# Altium PCB MyPCB.PcbDoc
Units mil, origin at the board's own origin, x right, y up, seen from the top; angles counter-clockwise.
Board outline 13489.26 x 4301.77 mil, 2 copper layers (Top Layer, Bottom Layer); 90 components, 113 nets, 667 pads, 53 vias.
Unrouted connection lines stored in the file: 2.
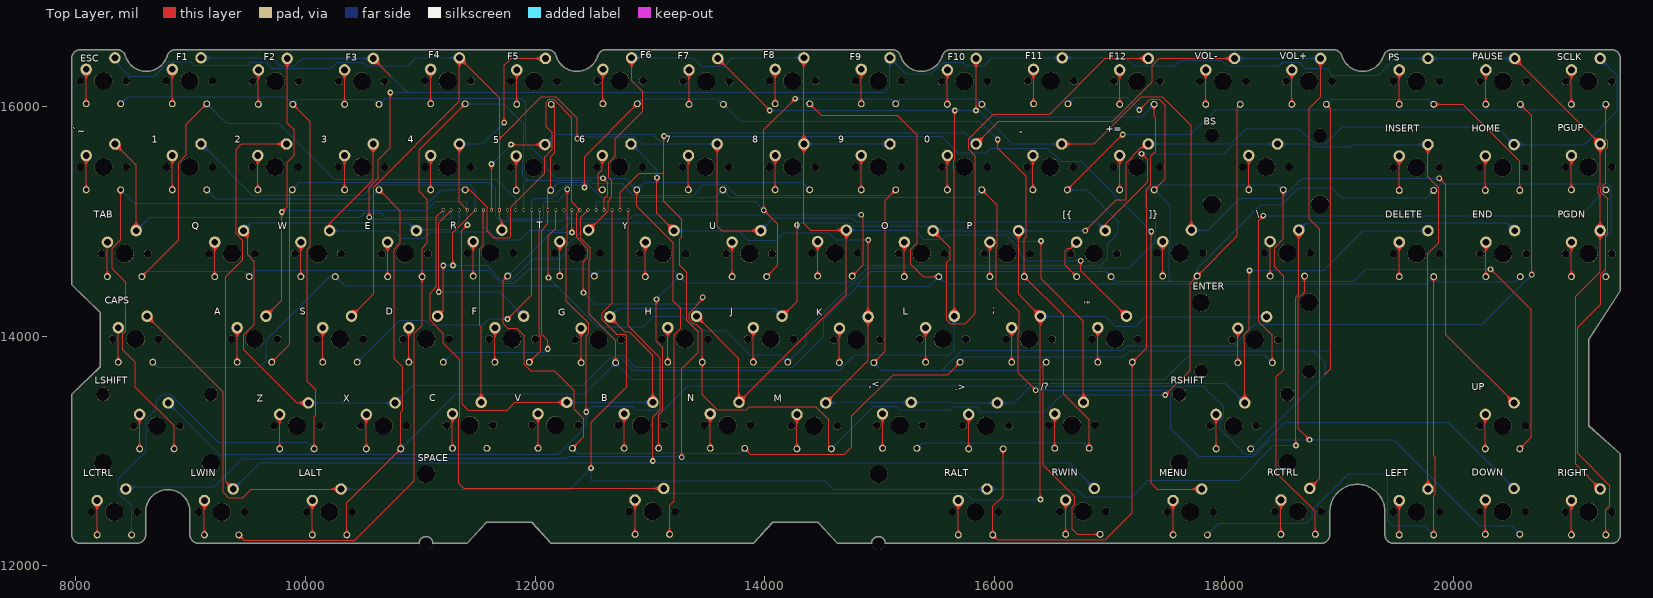
[diagram p0: Top Layer view]
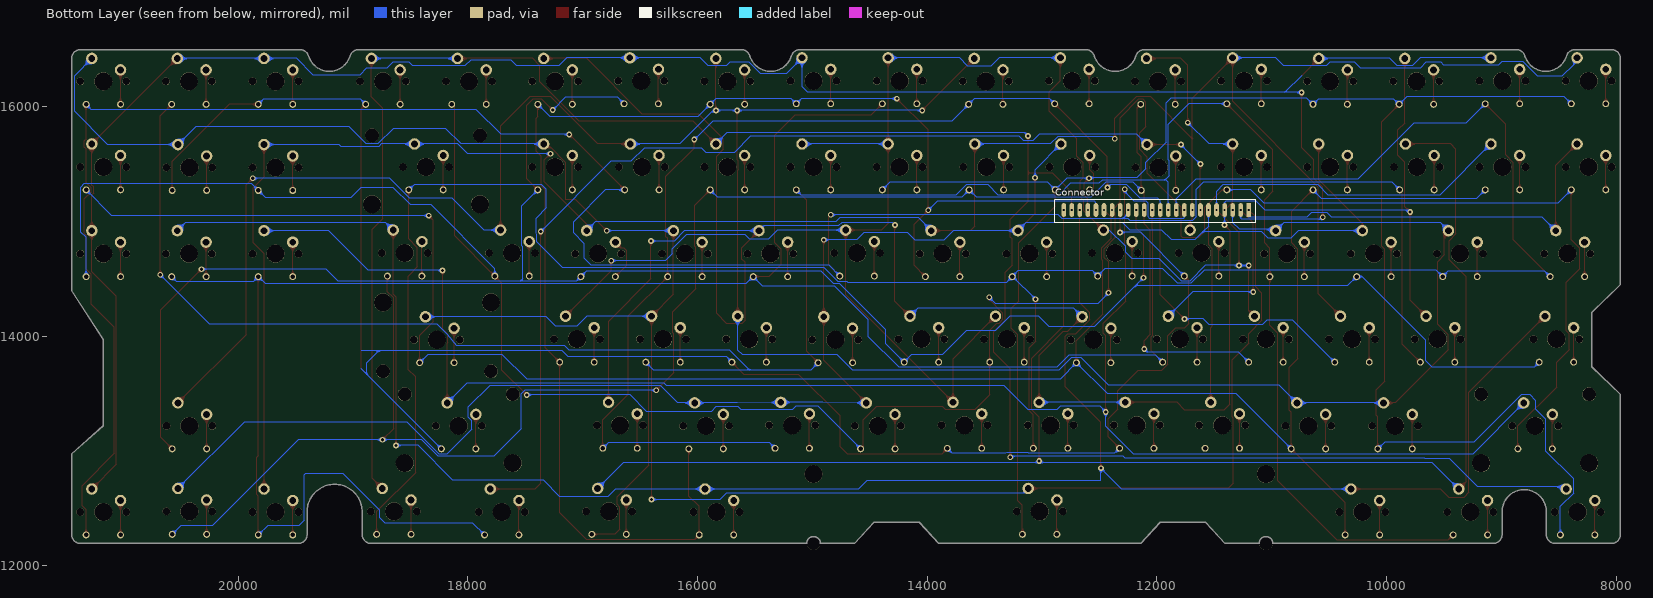
[diagram p1: Bottom Layer view, seen from below]

## Layer stack, top to bottom
Top Solder: solder mask 0.4, Solder Resist, Dk 3.5
Top Layer: signal copper 1.4
Dielectric 1: dielectric 12.6, FR-4, Dk 4.8
Bottom Layer: signal copper 1.4
Bottom Solder: solder mask 0.4, Solder Resist, Dk 3.5

## Board outline
8041.31,12195.79 8528.79,12195.79 ccw(c8528.79,12274.79) 8607.8,12274.79 8607.8,12471.66 cw(c8800.7,12471.66) 8993.61,12471.66 8993.61,12274.79 cw(c8993.87,12274.79) 8993.61,12274.8 8993.61,12274.79 ccw(c9072.61,12274.79) 9072.61,12195.79 10989.45,12195.79 ccw(c10989.45,12196.05) 10989.71,12196.05 ccw(c10989.45,12196.05) 10989.71,12196.06 cw(c11049.45,12196.64) 11109.18,12196.64 cw(c11049.45,12196.64) 11109.18,12196.06 ccw(c11109.44,12196.05) 11109.18,12196.05 ccw(c11109.44,12196.05) 11109.44,12195.79 11405.79,12195.79 ccw(c11405.79,12196.05) 11405.98,12195.87 11405.98,12195.88 11575.68,12380.85 11969.23,12380.85 12139.09,12195.88 ccw(c12139.28,12196.05) 12139.09,12195.87 12139.09,12195.88 12139.09,12195.87 ccw(c12139.28,12196.05) 12139.28,12195.79 12743.81,12195.79 ccw(c12743.86,12196.05) 12743.86,12195.78 13295.04,12195.78 ccw(c13295.04,12196.05) 13295.08,12195.79 13899.61,12195.79 ccw(c13899.61,12196.05) 13899.81,12195.87 13899.81,12195.88 14069.75,12380.94 14463.3,12380.75 14632.91,12195.88 14632.91,12195.87 cw(c14633.11,12196.05) 14632.91,12195.88 14632.91,12195.87 ccw(c14633.11,12196.05) 14633.11,12195.79 14929.45,12195.79 ccw(c14929.45,12196.05) 14929.71,12196.05 ccw(c14929.45,12196.05) 14929.71,12196.06 cw(c14989.45,12196.64) 15049.18,12196.64 cw(c14989.45,12196.64) 15049.18,12196.06 ccw(c15049.44,12196.05) 15049.18,12196.05 ccw(c15049.44,12196.05) 15049.44,12195.79 18841.3,12195.79 ccw(c18841.3,12274.79) 18920.3,12274.79 ccw(c18920.04,12274.79) 18920.3,12274.8 18920.3,12471.66 cw(c19160.08,12471.66) 18949.15,12585.68 ccw(c18948.92,12585.81) 18949.15,12585.69 cw(c19160.08,12471.66) 18951.72,12590.32 cw(c19160.08,12471.66) 18951.73,12590.33 cw(c19160.08,12471.66) 19368.35,12590.47 cw(c19160.08,12471.66) 19368.35,12590.46 cw(c19368.58,12590.59) 19368.35,12590.47 19368.35,12590.46 cw(c19160.08,12471.66) 19371,12585.69 cw(c19160.08,12471.66) 19371.01,12585.68 cw(c19371.24,12585.81) 19371,12585.69 19371.01,12585.68 cw(c19160.08,12471.66) 19399.85,12471.66 19399.85,12274.79 cw(c19400.12,12274.79) 19399.85,12274.8 19399.85,12274.79 ccw(c19478.86,12274.79) 19478.86,12195.79 21372.56,12195.79 ccw(c21372.56,12274.79) 21451.56,12274.79 21451.56,12974.32 ccw(c21451.3,12974.32) 21451.47,12974.52 21451.48,12974.52 21451.47,12974.52 cw(c21451.3,12974.32) 21451.48,12974.52 21451.47,12974.52 21175.97,13221.78 21175.97,13971.59 21451.52,14397.25 ccw(c21451.3,14397.4) 21451.56,14397.4 21451.56,16418.55 ccw(c21372.56,16418.55) 21372.56,16497.55 19463.47,16497.55 ccw(c19463.47,16418.55) 19387.94,16441.73 ccw(c19388.19,16441.65) 19387.94,16441.72 ccw(c19206.95,16497.29) 19387.94,16441.73 19387.94,16441.72 cw(c19206.95,16497.29) 19025.95,16441.72 cw(c19206.95,16497.29) 19025.95,16441.73 cw(c19025.7,16441.65) 19025.95,16441.72 19025.95,16441.73 ccw(c18950.42,16418.55) 19013.99,16465.46 ccw(c18950.42,16418.55) 18950.42,16497.55 15619.69,16497.55 ccw(c15619.69,16418.55) 15544.16,16441.73 ccw(c15544.42,16441.65) 15544.16,16441.72 ccw(c15363.17,16497.29) 15544.16,16441.73 15544.16,16441.72 cw(c15363.17,16497.29) 15462.42,16336.06 cw(c15363.17,16497.29) 15462.41,16336.05 cw(c15462.56,16335.83) 15462.42,16336.06 15462.41,16336.05 cw(c15363.17,16497.29) 15263.92,16336.05 ccw(c15263.78,16335.83) 15263.91,16336.06 ccw(c15363.17,16497.29) 15263.92,16336.05 15263.91,16336.06 cw(c15363.17,16497.29) 15182.17,16441.72 ccw(c15181.92,16441.65) 15182.17,16441.73 ccw(c15106.64,16418.55) 15106.64,16497.55 12619.69,16497.55 ccw(c12619.69,16418.55) 12544.16,16441.73 ccw(c12544.42,16441.65) 12544.16,16441.72 ccw(c12363.17,16497.29) 12544.16,16441.73 12544.16,16441.72 cw(c12363.17,16497.29) 12462.42,16336.06 cw(c12363.17,16497.29) 12462.41,16336.05 cw(c12462.56,16335.83) 12462.42,16336.06 12462.41,16336.05 cw(c12363.17,16497.29) 12263.92,16336.05 cw(c12363.17,16497.29) 12263.91,16336.06 cw(c12263.78,16335.83) 12263.92,16336.05 12263.91,16336.06 cw(c12363.17,16497.29) 12182.17,16441.72 ccw(c12181.92,16441.65) 12182.17,16441.73 ccw(c12106.64,16418.55) 12106.64,16497.55 8869.7,16497.55 ccw(c8869.7,16418.55) 8794.17,16441.73 cw(c8613.17,16497.29) 8712.43,16336.06 cw(c8613.17,16497.29) 8513.95,16336.04 ccw(c8513.78,16335.83) 8513.89,16336.07 cw(c8613.17,16497.29) 8432.18,16441.72 cw(c8613.17,16497.29) 8432.18,16441.73 cw(c8431.92,16441.65) 8432.18,16441.72 8432.18,16441.73 ccw(c8356.65,16418.55) 8356.65,16497.55 8041.31,16497.55 ccw(c8041.31,16418.55) 7962.3,16418.55 7962.3,14451.54 ccw(c7962.57,14451.54) 7962.38,14451.35 ccw(c7962.57,14451.54) 7962.38,14451.35 8212.09,14207.77 8212.09,13735.55 7962.38,13492.13 ccw(c7962.57,13491.94) 7962.3,13491.94 7962.3,12274.79 ccw(c8041.31,12274.79)

## Design rules (kind name [scope] priority, off if disabled: settings)
Clearance [All] p1: gap=10
PolygonConnect [All] p1: connectstyle=Relief reliefconductorwidth=10 reliefentries=4 polygonreliefangle="90 Angle" airgapwidth=10
RoutingVias [All] p1: holewidth=28 width=50 viastyle="Through Hole" minholewidth=28 minwidth=50 maxholewidth=28 maxwidth=50
SolderMaskExpansion [All] p1: expansion=4
Width [All] p1: maxlimit=10 minlimit=10 preferedwidth=10
30 further rules are at their usual default settings.

## Components (designator, comment, footprint, x,y, rotation, side; value= is the part's Value field where it differs from the comment)
0 "MX_SWITCH" MX100 15740,15475 r0 top
1 "MX_SWITCH" MX100 8990,15475 r0 top
2 "MX_SWITCH" MX100 9735,15475 r0 top
3 "MX_SWITCH" MX100 10490,15475 r0 top
4 "MX_SWITCH" MX100 11240,15475 r0 top
5 "MX_SWITCH" MX100 11985,15470 r0 top
6 "MX_SWITCH" MX100 12735,15475 r0 top
7 "MX_SWITCH" MX100 13485,15475 r0 top
8 "MX_SWITCH" MX100 14240,15475 r0 top
9 "MX_SWITCH" MX100 14990,15475 r0 top
"'\"" "MX_SWITCH" MX100 17050,13975 r0 top
+= "MX_SWITCH" MX100 17240,15475 r0 top
,< "MX_SWITCH" MX100 15175,13225 r0 top
- "MX_SWITCH" MX100 16485,15475 r0 top
.> "MX_SWITCH" MX100 15925,13220 r0 top
/? "MX_SWITCH" MX100 16675,13225 r0 top
; "MX_SWITCH" MX100 16300,13975 r0 top
[{ "MX_SWITCH" MX100 16865,14720 r0 top
\ "MX_SWITCH" MX100 18550,14725 r0 top
]} "MX_SWITCH" MX100 17615,14725 r0 top
`~ "MX_SWITCH" MX100 8240,15475 r0 top
A "MX_SWITCH" MX100 9555,13975 r0 top
B "MX_SWITCH" MX100 12925,13225 r0 top
BS "MX200WEI" MX100_WEIXIN200 18365,15475 r0 top
C "MX_SWITCH" MX100 11430,13225 r0 top
CAPS "MX_SWITCH" MX100 8520,13975 r0 top locked
Connector "24PIN" DIP24 12040,14890 r0 bottom locked
D "MX_SWITCH" MX100 11050,13975 r0 top
DELETE "MX_SWITCH" MX100 19675,14720 r0 top
DOWN "MX_SWITCH" MX100 20425,12475 r0 top
E "MX_SWITCH" MX100 10865,14720 r0 top
END "MX_SWITCH" MX100 20430,14720 r0 top
ENTER "MX200WEIC" MX_WEIXIN200_c 18270,13970 r0 top
ESC "MX_SWITCH" MX100 8240,16225 r0 top
F "MX_SWITCH" MX100 11800,13975 r0 top
F1 "MX_SWITCH" MX100 8990,16225 r0 top
F2 "MX_SWITCH" MX100 9740,16220 r0 top
F3 "MX_SWITCH" MX100 10490,16220 r0 top
F4 "MX_SWITCH" MX100 11240,16225 r0 top
F5 "MX_SWITCH" MX100 11990,16220 r0 top
F6 "MX_SWITCH" MX100 12740,16225 r0 top
F7 "MX_SWITCH" MX100 13490,16220 r0 top
F8 "MX_SWITCH" MX100 14240,16225 r0 top
F9 "MX_SWITCH" MX100 14990,16225 r0 top
F10 "MX_SWITCH" MX100 15740,16220 r0 top
F11 "MX_SWITCH" MX100 16490,16225 r0 top
F12 "MX_SWITCH" MX100 17240,16220 r0 top
G "MX_SWITCH" MX100 12550,13970 r0 top
H "MX_SWITCH" MX100 13305,13975 r0 top
HOME "MX_SWITCH" MX100 20425,15470 r0 top
I "MX_SWITCH" MX100 14610,14725 r0 top
INSERT "MX_SWITCH" MX100 19675,15470 r0 top
J "MX_SWITCH" MX100 14050,13975 r0 top
K "MX_SWITCH" MX100 14800,13970 r0 top
L "MX_SWITCH" MX100 15550,13975 r0 top
LALT "MX_SWITCH" MX100 10210,12470 r0 top
LCTRL "MX_SWITCH" MX100 8335,12470 r0 top
LEFT "MX_SWITCH" MX100 19675,12470 r0 top
LSHIFT "MX200WEI" MX100_WEIXIN200 8705,13220 r0 top
LWIN "MX_SWITCH" MX100 9270,12470 r0 top
M "MX_SWITCH" MX100 14430,13220 r0 top
MENU "MX_SWITCH" MX100 17705,12470 r0 top
N "MX_SWITCH" MX100 13675,13225 r0 top
O "MX_SWITCH" MX100 15365,14720 r0 top
P "MX_SWITCH" MX100 16110,14720 r0 top
PAUSE "MX_SWITCH" MX100 20430,16220 r0 top
PGDN "MX_SWITCH" MX100 21175,14720 r0 top
PGUP "MX_SWITCH" MX100 21175,15475 r0 top
PS "MX_SWITCH" MX100 19675,16220 r0 top
Q "MX_SWITCH" MX100 9360,14720 r0 top locked
R "MX_SWITCH" MX100 11610,14725 r0 top
RALT "MX_SWITCH" MX100 15835,12470 r0 top
RCTRL "MX_SWITCH" MX100 18645,12475 r0 top
RIGHT "MX_SWITCH" MX100 21175,12470 r0 top
RSHIFT "MX200WEI" MX100_WEIXIN200 18080,13220 r0 top
RWIN "MX_SWITCH" MX100 16770,12475 r0 top
S "MX_SWITCH" MX100 10300,13975 r0 top locked
SCLK "MX_SWITCH" MX100 21175,16220 r0 top
SPACE "MX625WEIXIN" MX100_WEIXIN625 13020,12475 r0 top
T "MX_SWITCH" MX100 12365,14725 r0 top
TAB "MX_SWITCH" MX100 8425,14720 r0 top locked
U "MX_SWITCH" MX100 13865,14720 r0 top
UP "MX_SWITCH" MX100 20425,13220 r0 top
V "MX_SWITCH" MX100 12175,13225 r0 top
VOL+ "MX_SWITCH" MX100 18740,16220 r0 top
VOL- "MX_SWITCH" MX100 17990,16220 r0 top
W "MX_SWITCH" MX100 10110,14720 r0 top
X "MX_SWITCH" MX100 10680,13220 r0 top
Y "MX_SWITCH" MX100 13110,14720 r0 top
Z "MX_SWITCH" MX100 9925,13220 r0 top

## Footprints (in the part's own frame and the unit in brackets; to place one, negate y for a bottom-side part, rotate by r counter-clockwise, add the part's x,y. Pads: shape width x height; smd on the part's side, far side on the other; paste and mask are expansions set on the pad)
DIP24 [mil]
  rect 40x120 / inner rect 25x25 / far side rect 25x25 hole 20: 1(-840,-210)
  oval 40x120 / inner round 25 / far side round 25 hole 20: 2(-770,-210) 3(-700,-210) 4(-630,-210) 5(-560,-210) 6(-490,-210) 7(-420,-210) 8(-350,-210) 9(-280,-210) 10(-210,-210) 11(-140,-210) 12(-70,-210) 13(0,-210) 14(70,-210) 15(140,-210) 16(210,-210) 17(280,-210) 18(350,-210) 19(420,-210) 20(490,-210) 21(560,-210) 22(630,-210) 23(700,-210) 24(770,-210)
  silkscreen extent -900,-300 850,-100
MX100 [mil]
  round 100 hole 59: 0(100,200) 1(-150,100)
  round 60 hole 39: 2(-150,-200) 3(150,-200)
  round 67 hole 67 unplated: ""(-200,0) ""(200,0)
  round 157 hole 157 unplated: ""(0,0)
MX100_WEIXIN200 [mil]
  round 100 hole 59: 0(100,200) 1(-150,100)
  round 60 hole 39: 2(-150,-200) 3(150,-200)
  round 157 hole 157 unplated: ""(-470,-325) ""(0,0) ""(470,-325)
  round 120 hole 120 unplated: ""(-470,275) ""(470,275)
  round 67 hole 67 unplated: ""(-200,0) ""(200,0)
MX100_WEIXIN625 [mil]
  round 100 hole 59: 0(100,200) 1(-150,100)
  round 60 hole 39: 2(-150,-200) 3(150,-200)
  round 120 hole 120 unplated: ""(-1970,-275) ""(1970,-275)
  round 157 hole 157 unplated: ""(-1970,325) ""(0,0) ""(1970,325)
  round 67 hole 67 unplated: ""(-200,0) ""(200,0)
MX_WEIXIN200_c [mil]
  round 100 hole 59: 0(100,200) 1(-150,100)
  round 60 hole 39: 2(-150,-200) 3(150,-200)
  round 120 hole 120 unplated: ""(-470,-275) ""(470,-275)
  round 157 hole 157 unplated: ""(-470,325) ""(0,0) ""(470,325)
  round 67 hole 67 unplated: ""(-200,0) ""(200,0)

## Via types
v1: diameter 50, hole 28, Top Layer to Bottom Layer, 53 vias

## Nets (pads, with @x,y where several pads share a name; then routed paths per layer and width w, separated by ;. In a path a pad name is that pad's centre, name@x,y a point inside that pad or via, vN(x,y) a via of type N, cw(c..) or ccw(c..) an arc to the next point about the centre after c; other vN are vias at no path point)
Net0_1: 0.1 0.2 | length 300
  Top Layer w10: 0.2 0.1
Net1_1: 1.1 1.2 | length 300
  Top Layer w10: 1.2 1.1
Net2_1: 2.1 2.2 | length 300
  Top Layer w10: 2.2 2.1
Net3_1: 3.1 3.2 | length 300
  Top Layer w10: 3.2 3.1
Net4_1: 4.1 4.2 | length 300
  Top Layer w10: 4.2 4.1
Net5_1: 5.1 5.2 | length 300
  Top Layer w10: 5.2 5.1
Net6_1: 6.1 6.2 | length 349.5
  Top Layer w10: 6.2 12550,15275 12550,15416 12585,15451 6.1
Net7_1: 7.1 7.2 | length 300
  Top Layer w10: 7.2 7.1
Net8_1: 8.1 8.2 | length 300
  Top Layer w10: 8.2 8.1
Net9_1: 9.1 9.2 | length 300
  Top Layer w10: 9.2 9.1
"Net'\"_1": "'\".1" "'\".2" | length 300
  Top Layer w10: 16900,13775 16900,14075
Net+=_1: +=.1 +=.2 | length 300
  Top Layer w10: +=.2 +=.1
Net,<_1: ,<.1 ,<.2 | length 300
  Top Layer w10: 15025,13025 15025,13325
Net-_1: -.1 -.2 | length 300
  Top Layer w10: -.2 -.1
Net.>_1: .>.1 .>.2 | length 300
  Top Layer w10: .>.2 .>.1
Net/?_1: /?.1 /?.2 | length 300
  Top Layer w10: /?.2 /?.1
Net;_1: ;.1 ;.2 | length 300
  Top Layer w10: 16150,13775 16150,14075
Net[{_1: [{.1 [{.2 | length 395.4
  Top Layer w10: [{.2 16616.5,14618.5 16616.5,14745 16640,14768.5 16663.5,14768.5 [{.1
Net\_1: \.1 \.2 | length 300
  Top Layer w10: \.2 \.1
Net]}_1: ]}.1 ]}.2 | length 300
  Top Layer w10: ]}.2 ]}.1
Net`~_1: `~.1 `~.2 | length 300
  Top Layer w10: `~.2 `~.1
NetA_1: A.1 A.2 | length 300
  Top Layer w10: A.2 A.1
NetB_1: B.1 B.2 | length 300
  Top Layer w10: B.2 B.1
NetBS_1: BS.1 BS.2 | length 300
  Top Layer w10: BS.2 BS.1
NetC_1: C.1 C.2 | length 300
  Top Layer w10: C.2 C.1
NetCAPS_1: CAPS.1 CAPS.2 | length 300
  Top Layer w10: CAPS.2 CAPS.1
NetD_1: D.1 D.2 | length 300
  Top Layer w10: D.2 D.1
NetDELETE_1: DELETE.1 DELETE.2 | length 300
  Top Layer w10: DELETE.2 DELETE.1
NetDOWN_1: DOWN.1 DOWN.2 | length 300
  Top Layer w10: DOWN.2 DOWN.1
NetE_1: E.1 E.2 | length 300
  Top Layer w10: E.2 E.1
NetEND_1: END.1 END.2 | length 300
  Top Layer w10: END.2 END.1
NetENTER_1: ENTER.1 ENTER.2 | length 300
  Top Layer w10: ENTER.2 ENTER.1
NetESC_1: ESC.1 ESC.2 | length 300
  Top Layer w10: ESC.2 ESC.1
NetF1_1: F1.1 F1.2 | length 300
  Top Layer w10: F1.2 F1.1
NetF2_1: F2.1 F2.2 | length 300
  Top Layer w10: F2.2 F2.1
NetF3_1: F3.1 F3.2 | length 300
  Top Layer w10: F3.2 F3.1
NetF4_1: F4.1 F4.2 | length 300
  Top Layer w10: F4.2 F4.1
NetF5_1: F5.1 F5.2 | length 300
  Top Layer w10: F5.2 F5.1
NetF6_1: F6.1 F6.2 | length 300
  Top Layer w10: F6.2 F6.1
NetF7_1: F7.1 F7.2 | length 300
  Top Layer w10: F7.2 F7.1
NetF8_1: F8.1 F8.2 | length 300
  Top Layer w10: F8.2 F8.1
NetF9_1: F9.1 F9.2 | length 300
  Top Layer w10: F9.2 F9.1
NetF10_1: F10.1 F10.2 | length 300
  Top Layer w10: F10.2 F10.1
NetF11_1: F11.1 F11.2 | length 300
  Top Layer w10: F11.2 F11.1
NetF12_1: F12.1 F12.2 | length 300
  Top Layer w10: F12.2 F12.1
NetF_1: F.1 F.2 | length 300
  Top Layer w10: F.2 F.1
NetG_1: G.1 G.2 | length 300
  Top Layer w10: G.2 G.1
NetH_1: H.1 H.2 | length 300
  Top Layer w10: H.2 H.1
NetHOME_1: HOME.1 HOME.2 | length 300
  Top Layer w10: HOME.2 HOME.1
NetI_1: I.1 I.2 | length 300
  Top Layer w10: I.2 I.1
NetINSERT_1: INSERT.1 INSERT.2 | length 300
  Top Layer w10: INSERT.2 INSERT.1
NetJ_1: J.1 J.2 | length 300
  Top Layer w10: J.2 J.1
NetK_1: K.1 K.2 | length 300
  Top Layer w10: K.2 K.1
NetL_1: L.1 L.2 | length 300
  Top Layer w10: L.2 L.1
NetLALT_1: LALT.1 LALT.2 | length 300
  Top Layer w10: LALT.2 LALT.1
NetLCTRL_1: LCTRL.1 LCTRL.2 | length 300
  Top Layer w10: LCTRL.2 LCTRL.1
NetLEFT_1: LEFT.1 LEFT.2 | length 300
  Top Layer w10: LEFT.2 LEFT.1
NetLSHIFT_1: LSHIFT.1 LSHIFT.2 | length 300
  Top Layer w10: LSHIFT.2 LSHIFT.1
NetLWIN_1: LWIN.1 LWIN.2 | length 300
  Top Layer w10: LWIN.2 LWIN.1
NetM_1: M.1 M.2 | length 300
  Top Layer w10: M.2 M.1
NetMENU_1: MENU.1 MENU.2 | length 300
  Top Layer w10: MENU.2 MENU.1
NetN_1: N.1 N.2 | length 300
  Top Layer w10: N.2 N.1
NetO_1: O.1 O.2 | length 300
  Top Layer w10: O.2 O.1
NetP_1: P.1 P.2 | length 300
  Top Layer w10: P.2 P.1
NetPAUSE_1: PAUSE.1 PAUSE.2 | length 300
  Top Layer w10: PAUSE.2 PAUSE.1
NetPGDN_1: PGDN.1 PGDN.2 | length 300
  Top Layer w10: PGDN.2 PGDN.1
NetPGUP_1: PGUP.1 PGUP.2 | length 300
  Top Layer w10: PGUP.2 PGUP.1
NetPS_1: PS.1 PS.2 | length 300
  Top Layer w10: PS.2 PS.1
NetQ_1: Q.1 Q.2 | length 300
  Top Layer w10: Q.2 Q.1
NetR_1: R.1 R.2 | length 300
  Top Layer w10: R.2 R.1
NetRALT_1: RALT.1 RALT.2 | length 300
  Top Layer w10: RALT.2 RALT.1
NetRCTRL_1: RCTRL.1 RCTRL.2 | length 300
  Top Layer w10: RCTRL.2 RCTRL.1
NetRIGHT_1: RIGHT.1 RIGHT.2 | length 300
  Top Layer w10: RIGHT.2 RIGHT.1
NetRSHIFT_1: RSHIFT.1 RSHIFT.2 | length 300
  Top Layer w10: RSHIFT.2 RSHIFT.1
NetRWIN_1: RWIN.1 RWIN.2 | length 300
  Top Layer w10: RWIN.2 RWIN.1
NetS_1: S.1 S.2 | length 300
  Top Layer w10: S.2 S.1
NetSCLK_1: SCLK.1 SCLK.2 | length 300
  Top Layer w10: SCLK.2 SCLK.1
NetSPACE_1: SPACE.1 SPACE.2 | length 300
  Top Layer w10: SPACE.2 SPACE.1
NetT_1: T.1 T.2 | length 300
  Top Layer w10: T.2 T.1
NetTAB_1: TAB.1 TAB.2 | length 300
  Top Layer w10: TAB.2 TAB.1
NetU_1: U.1 U.2 | length 300
  Top Layer w10: U.2 U.1
NetUP_1: UP.1 UP.2 | length 300
  Top Layer w10: UP.2 UP.1
NetV_1: V.1 V.2 | length 300
  Top Layer w10: V.2 V.1
NetVOL+_1: VOL+.1 VOL+.2 | length 300
  Top Layer w10: VOL+.2 VOL+.1
NetVOL-_1: VOL-.1 VOL-.2 | length 300
  Top Layer w10: VOL-.2 VOL-.1
NetW_1: W.1 W.2 | length 300
  Top Layer w10: W.2 W.1
NetX_1: X.1 X.2 | length 300
  Top Layer w10: X.2 X.1
NetY_1: Y.1 Y.2 | length 300
  Top Layer w10: Y.2 Y.1
NetZ_1: Z.1 Z.2 | length 300
  Top Layer w10: Z.2 Z.1
P1: +=.0 ;.0 `~.0 Connector.1 ENTER.0 HOME.0 P.0 SCLK.0 SPACE.0 TAB.0 | length 22369.4
  Top Layer w10: `~.0 8525,15490 TAB.0 ; Connector.1 11140,15040 11140,14431 11085,14376 11085,14140 11201.5,14023.5 11201.5,13940 11345,13796.5 11345,13298.08 11333,13286.08 11333,12720 11378,12675 SPACE.0 ; P.0 16210,14365 16400,14175 v1(16400,12578) ; v1(16791,14920) 17060,15189 17146,15189 17146.5,15513.73 17277.77,15645 17310,15645 +=.0
  Bottom Layer w10: TAB.0 8644,15039 10477.21,15039 10515,15076.79 10655.56,15076.79 10693.35,15039 11200,15039 Connector.1 ; SPACE.0 13160,12635 15750,12635 15807,12578 v1(16400,12578) ; P.0 v1(16791,14920) ; 16400,14175 16966,14175 17053,14088 17234,14088 17316,14170 ENTER.0 ; +=.0 18059,15675 18191,15807 18651,15807 18783,15675 18885,15675 19034,15824 20371,15824 HOME.0 21136,15670 21424,15958 21424,16271 SCLK.0
P2: Connector.2 F1.0 F3.0 F9.0 F11.0 F.0 PAUSE.0 PGDN.0 PGUP.0 PS.0 RIGHT.0 | length 20161.5
  Top Layer w10: v1(10555,15036) 10555,15300 10633,15378 10633,15538 10739,15644 v1(10739,16124) ; F3.0 10739,16271 ; v1(11160,14386) 11160,14990 Connector.2 ; PAUSE.0 PGUP.0 21275,15316.92 21260,15301.92 21260,15248.08 21275,15233.08 PGDN.0 21275,14561.92 21060,14346.92 21060,12885 RIGHT.0
  Bottom Layer w10: F1.0 9704,16425 9774,16355 9905,16355 9970,16420 F3.0 ; v1(10555,15036) 10572,15019 11260,15019 11270,15029 Connector.2 ; v1(10739,16124) 10886,16124 ; 10739,16271 10886,16124 ; v1(11160,14386) 11689,14386 F.0 ; PAUSE.0 PS.0 19492,16420 19346,16274 18942,16274 18883,16333 18707,16333 18655,16385 18512,16385 18482,16355 18025,16355 17977,16403 17623,16403 17575,16355 17207,16355 17137,16425 F11.0 15975,16425 15905,16355 15748,16355 15718,16385 15549,16385 15451,16287 15228,16287 F9.0 15090,16174 15040,16124 10886,16124
P3: -.0 ]}.0 Connector.3 E.0 F7.0 F10.0 L.0 Q.0 UP.0 X.0 Z.0 | length 22592.2
  Top Layer w10: Q.0 9495,14885 9495,14711 9555,14651 9555,14107.23 9461.5,14013.73 9461.5,13882.5 9924,13420 Z.0 ; F7.0 v1(14043,15967) ; L.0 15650,15445 15646,15449 15646,15528 15655,15537 v1(15655,15967) ; v1(15840,15967) F10.0 ; -.0 16868.38,15675 17278.38,16085 17463,16085 17715,15833 ]}.0 ; v1(19873,15376) 19930,15319 19930,14015 UP.0
  Bottom Layer w10: Q.0 9529,14989 10896,14989 E.0 10965,14931 11280,14931 11340,14991 Connector.3 ; Z.0 X.0 10934,13574 12418,13574 12659,13815 12745,13815 12856,13704 14649,13704 14783,13838 15608,13838 15650,13880 L.0 ; v1(14043,15967) v1(15655,15967) v1(15840,15967) 15861,15967 16153,15675 -.0 ; ]}.0 17858,14925 18135,15202 18506,15202 18680,15376 v1(19873,15376)
P4: 4.0 /?.0 A.0 B.0 Connector.4 F2.0 F5.0 F12.0 G.0 J.0 O.0 V.0 | length 21116.3
  Top Layer w10: A.0 9794,14314 v1(9794,15083) 9840,15129 9840,15516 9900,15576 9900,15797 9840,15857 F2.0 ; 4.0 11340,15170 Connector.4 ; v1(11410,14970) 11361,14921 11361,14577 11366,14572 11366,13409 11417,13358 11756,13358 11823,13425 V.0 ; v1(11730,15861) 11730,16360 11790,16420 F5.0 ; G.0 12781.5,14038.5 12821.26,14038.5 13025,13834.76 B.0 ; J.0 14281,14306 v1(14281,14970) ; O.0 15614,14771 15614,14672 15585,14643 15585,14140 15615,14110 15744,14110 15834,14200 15834,15569 15775,15628 15775,15720 15990,15935 16480,15935 16965,16420 F12.0 ; v1(16406,14830) 16406,14501 16775,14132 /?.0
  Bottom Layer w10: v1(9794,15083) 9807.79,15096.79 11053.79,15096.79 11135,15178 11400,15178 11410,15168 Connector.4 v1(11410,14970) ; 4.0 11544,15675 v1(11730,15861) ; V.0 B.0 ; G.0 12724,14244 14081,14244 J.0 ; v1(14281,14970) 14301,14990 14746,14990 14775,14961 15424,14961 O.0 16114,14920 16204,14830 v1(16406,14830)
P5: 1.0 8.0 9.0 "'\".0" Connector.5 D.0 F6.0 F8.0 H.0 I.0 N.0 T.0 | length 16913.1
  Top Layer w10: D.0 11200,14225 v1(11200,14617) ; v1(11284,14617) 11284,14904 Connector.5 ; T.0 12635,15095 12635,15180 12669,15214 12669,15354 12641,15382 12641,15513.23 12697,15569.23 12697,15720 12935,15958 12935,16129 12840,16224 F6.0 ; H.0 13775,13805 N.0 14710,14360 I.0 14400,14925 14340,14985 8.0 F8.0 ; v1(16752,14659) 16752,14573 17150,14175
  Bottom Layer w10: 1.0 9535,15230 10505,15230 10595,15320 11425,15320 11480,15265 Connector.5 ; v1(11200,14617) v1(11284,14617) 11578,14617 11715,14480 11785,14480 11981,14676 12214,14676 12271,14733 12271,14782.9 12413.1,14925 T.0 ; F6.0 13373,16425 13444.5,16353.5 13644.5,16353.5 13716,16425 F8.0 ; 8.0 9.0 ; I.0 15306,14925 15386,14845 15544,14845 15584,14885 16099.51,14885 16220.17,14764.34 16220.17,14720.83 16282,14659 v1(16752,14659)
P6: 3.0 6.0 ,<.0 .>.0 C.0 Connector.6 DOWN.0 K.0 M.0 W.0 Y.0 | length 17057.3
  Top Layer w10: W.0 10210,14984 10590,15364 3.0 ; C.0 11530,14076 11516,14090 11516,14763.23 11550,14797.23 Connector.6 ; v1(13060,15380) 13060,15070 Y.0 ; M.0 14900,13790 K.0 v1(14900,14840)
  Bottom Layer w10: W.0 10769,14920 10834,14855 11030,14855 11086,14911 11599,14911 ; Connector.6 11550,14960 11599,14911 ; 6.0 13060,15450 v1(13060,15380) ; M.0 14908,13425 15275,13425 15655,13420 .>.0 16170,13420 16320,13570 17810,13570 17995,13385 17995,13293.08 17968,13266.08 17968,13192 18185,12975 18250,12975 18527,13252 19948,13252 DOWN.0 ; v1(14900,14840) 14613,14840 14552,14901 14170,14901 14104,14835 13856,14835 13771,14920 Y.0 13140,14990 12295,14990 12230,14925 11955,14925 11870,14840 11670,14840 11599,14911
P7: 5.0 Connector.7 MENU.0 | length 9321.5
  Top Layer w10: Connector.7 v1(11620,15500) ; v1(11790,15670) 5.0 ; v1(17366,14912) 17366,12720 17416,12670 MENU.0
  Bottom Layer w10: v1(11620,15500) v1(11790,15670) ; 5.0 12175,15760 13025.21,15760 13080.54,15704.67 13161,15704.67 13199.33,15743 15539,15743 15682,15600 15923,15600 15963,15640 16466,15640 16582,15524 16754,15524 v1(17366,14912)
P8: 7.0 [{.0 BS.0 Connector.8 ESC.0 F4.0 INSERT.0 LEFT.0 R.0 S.0 U.0 | length 20546.8
  Top Layer w10: S.0 10595,14370 10595,15300 11340,16045 F4.0 11690,16075 11690,15720 ; R.0 11710,15002 11690,15022 Connector.8 11690,15720 ; v1(12366,15720) 12366,15899 12180,16085 12055,16085 11690,15720 ; 7.0 13585,14960 13625,14920 U.0 ; [{.0 16965,14977 17334,15346 17334,15536 v1(17280,15590) ; LEFT.0 19775,14718 19870,14813 19870,15296 19775,15391 INSERT.0
  Bottom Layer w10: ESC.0 8368,16397 8368,16367 8472,16263 8683,16263 8810,16390 8995,16390 9025,16360 9500,16360 9525,16385 9656,16385 9706,16335 10225,16335 10275,16385 10495,16385 10525,16355 10895,16355 10965,16425 F4.0 ; v1(12366,15720) 12386,15740 12861.92,15740 12926.92,15675 7.0 ; U.0 14075.52,15030.52 14760.48,15030.52 14795,14996 16889,14996 [{.0 ; v1(17280,15590) 18003,15590 18088,15675 BS.0 18754,15675 18776.5,15652.5 19102.5,15652.5 19120,15670 INSERT.0
P9: Connector.9 DELETE.0 LSHIFT.0 RSHIFT.0 | length 15662.3
  Top Layer w10: v1(12280,15280) 12280,14798.08 12271,14789.08 12271,14307 12465,14113 12465,14024.79 12445,14004.79 v1(12445,13341) ; RSHIFT.0 18180,13940 18176,13944 18176,14018.9 18220,14062.9 v1(18220,14574)
  Bottom Layer w10: LSHIFT.0 9250,12975 12203,12975 12445,13217 v1(12445,13341) 12494,13390 12840,13390 12870,13360 13118,13360 13328,13570 16268.49,13570 16288.49,13590 18010,13590 RSHIFT.0 ; Connector.9 11760,15035 11770,15025 12060,15025 12075,15040 12075,15160 12090,15175 12195,15175 12280,15260 v1(12280,15280) ; v1(18220,14574) 18867,14574 19213,14920 DELETE.0
P10: B.3 BS.3 Connector.10 F1.3 Q.3 RCTRL.3 T.3 TAB.3 Y.3 | length 20671.2
  Top Layer w10: TAB.3 8896,14841 8896,15513.23 8963,15580.23 8963,15848 F1.3 ; v1(13056.5,14323.5) 13056.5,13954.91 13110,13901.41 13110,13351.72 13075,13316.72 B.3 ; BS.3 18515,14848.08 18440,14773.08 18440,14604 18519,14525 18519,13709 18456,13646 18456,12814 18795,12475 RCTRL.3
  Bottom Layer w10: TAB.3 8620,14565 9465,14565 Q.3 9566.65,14576.65 11588.35,14576.65 11705,14460 11819.36,14460 11947.36,14588 12452,14588 T.3 12559,14569 13211,14569 Y.3 ; F1.3 9309,15856 9764,15856 10250,15370 11659,15370 11830,15199 Connector.10 ; v1(13056.5,14323.5) 13253,14520 Y.3 ; BS.3 18469,15321 17358,15321 17317,15280 17317,15119 17406,15030 17406,14896 17400,14890 17400,14823 17174,14597 14895.64,14597 14775.6,14476.96 14695.96,14476.96 14687,14468 13312,14468 Y.3
P11: 9.3 ;.3 Connector.11 E.3 F4.3 K.3 LWIN.3 PAUSE.3 RWIN.3 | length 22004.5
  Top Layer w10: LWIN.3 9465,12225 10427,12225 10945,12743 10945,14027.54 11015,14097.54 E.3 11015,14768.5 11062,14815.5 11062,15191 10991,15262 10991,15626 F4.3 ; K.3 15049,13869 15049,15184 9.3 ; 16450,13775 16426,13751 16426,12875.23 16700,12601.23 16700,12537.23 16676,12513.23 16676,12319 16720,12275 RWIN.3 ; PAUSE.3 20679,15921 v1(20679,14536)
  Bottom Layer w10: F4.3 11720,16025 11900,15845 11900,15537 11891,15528 11891,15400 11931,15360 ; Connector.11 11900,15340 11920,15360 11931,15360 ; K.3 15014,13706 15547,13706 ; 9.3 15095,15230 13750,15230 13660,15320 13470,15320 13380,15230 12854,15230 12753,15331 12505.04,15331 12476.04,15360 11931,15360 ; 16450,13775 16381,13706 15547,13706 ; v1(20679,14536) 20248,14105 18266.13,14105 18176,14014.87 18096,13920 17156,13920 17115,13879 15720,13879 15547,13706
P12: ,<.3 /?.3 Connector.12 F6.3 F7.3 P.3 S.3 | length 11934.6
  Top Layer w10: v1(11760,14151) 11970,14361 Connector.12 ; v1(12429.95,15297.05) 12429.95,15564.95 F6.3 ; v1(16029,15713) 16029,15638 16275,15392 16275,14869 16260,14854 P.3 16602,14178 16602,13496 16825,13273 /?.3
  Bottom Layer w10: S.3 10815,14140 11044,14140 11084,14100 11545,14100 11596,14151 v1(11760,14151) ; Connector.12 11970,15180 11994,15204 12144,15204 12260,15320 12407,15320 v1(12429.95,15297.05) ; F6.3 12934,16069 13591,16069 F7.3 13785,15875 15867,15875 v1(16029,15713) ; 15325,13025 15372,13072 16778,13072 /?.3
P13: Connector.13 DELETE.3 END.3 F8.3 F.3 LEFT.3 MENU.3 O.3 | length 18002.7
  Top Layer w10: F.3 12049,13874 12049,13994.59 12036,14007.59 12036,14932.57 12040,14936.57 Connector.13 ; F8.3 14491,15924 15153,15924 15327,15750 15327,14814.23 15271.5,14758.73 15271.5,14627.5 15379,14520 O.3 ; LEFT.3 19825,12608 19840,12623 19840,12945 19825,12960 DELETE.3
  Bottom Layer w10: F.3 12010,13835 12765,13835 12870,13730 14245,13730 14511,13996 14511,14145 14802.96,14436.96 15431.96,14436.96 O.3 15578,14457 19762,14457 DELETE.3 19870,14475 20535,14475 END.3 ; MENU.3 17957,12372 18720,12372 18768,12420 18768,12485 19086,12803 19415,12803 19424,12794 19424,12400 19473,12351 19744,12351 LEFT.3
P14: 0.3 5.3 7.3 \.3 Connector.14 D.3 DOWN.3 F5.3 | length 15564.2
  Top Layer w10: v1(12110,13890) 12110,13961.87 12056,14015.87 12056,14924.28 12110,14978.28 Connector.14 12110,15245 5.3 12135,15563 12170,15598 12170,15990 F5.3 ; 0.3 16025,15140 16025,14785.58 16016,14776.58 16016,14413 16215,14214 16215,14030.25 16206,14021.25 16206,13684 v1(16360,13530) ; \.3 18700,14388 18646.5,14334.5 18646.5,13196.5 v1(18744,13099)
  Bottom Layer w10: D.3 11285,13860 12080,13860 v1(12110,13890) ; 5.3 12205,15340 12444.14,15340 12574.14,15210 13570,15210 7.3 13700,15210 15825,15210 0.3 ; v1(16360,13530) 17505,13530 17535,13500 17535,13195 17775,12955 18258.69,12955 18402.69,13099 v1(18744,13099) 19477,13099 20226,12350 20500,12350 DOWN.3
P15: +=.3 [{.3 CAPS.3 Connector.15 F11.3 J.3 UP.3 W.3 | length 18053.6
  Top Layer w10: v1(12116,14510) 12116,14876 12180,14940 Connector.15 ; v1(17261,15970) 17356,16065 17437,16065 17489,16013 17489,15374 +=.3 ; v1(20320,14585) 20674,14231 20674,13119 UP.3
  Bottom Layer w10: CAPS.3 8715,13730 9600,13730 9657,13787 9657,13967 10210,14520 W.3 10340,14440 12186,14440 ; v1(12116,14510) 12186,14440 ; F11.3 16696,16081 17150,16081 v1(17261,15970) ; +=.3 17530,15135 17530,14787 17521,14778 17521,14500 17541,14480 ; v1(20320,14585) 19234,14585 19129,14480 17541,14480 ; 12186,14440 12543,14083 12935,14083 13027,14175 13280,14175 13407,14048 13660,14048 13870,13838 14137,13838 J.3 14361,13936 14361,14056 14761.96,14456.96 14815.6,14456.96 14923.64,14565 16970,14565 [{.3 17055,14480 17541,14480
P16: 2.3 -.3 A.3 Connector.16 I.3 RIGHT.3 SCLK.3 | length 19782.4
  Top Layer w10: A.3 9861,13931 9861,15251 2.3 ; I.3 14858.5,14623.5 14858.5,15039.5 v1(14840,15058) ; -.3 v1(17118,15758) ; RIGHT.3 21325,12488.59 21360,12523.59 21360,12700 21080,12980 21080,14080 21280,14280 21280,14538.64 21325,14583.64 21325,14878.08 21340,14893.08 21340,15196.36 21280,15256.36 21280,15293.64 21325,15338.64 21325,15633.08 21340,15648.08 21340,15701.92 21325,15716.92 SCLK.3
  Bottom Layer w10: 2.3 9950,15340 11595,15340 11655,15280 11655,15040 11690,15005 12230,15005 12250,15025 12295,15025 ; Connector.16 12250,15070 12295,15025 ; I.3 14853,14618 16925,14618 16987,14680 16987,14808 17080,14901 17080,14997 16802,15275 -.3 ; v1(14840,15058) 12857.5,15058 12824.5,15025 12295,15025 ; v1(17118,15758) 17711,15758 17928,15975 21280,15975 SCLK.3
P17: Connector.17 HOME.3 L.3 N.3 PS.3 R.3 RSHIFT.3 V.3 VOL+.3 | length 15927.5
  Top Layer w10: R.3 11720,14485 11720,14109 11760,14069 11840,14069 11905,14004 11905,13755 11960,13700 12164,13700 12340,13524 12340,13365 12424,13281 12424,13124 V.3 ; v1(12320,14905) Connector.17 ; N.3 13875,12975 14692,12975 14757,13040 14757,13307 15117,13667 15592,13667 L.3 ; 18880,13670 18929,13719 18929,15981 VOL+.3 ; PS.3 20080,16020 20575,15525 HOME.3
  Bottom Layer w10: R.3 12140,14905 v1(12320,14905) ; V.3 12370,12980 13113.52,12980 13120,12986.48 13309.05,12986.48 13315.52,12980 13780,12980 N.3 ; L.3 15745,13820 17126,13820 17179,13873 18775,13873 ; RSHIFT.3 18880,13670 ; VOL+.3 18935,16065 19780,16065 PS.3 ; 18929,13719 18880,13670 ; 18929,13873 18775,13873 ; 18775,13873 18880,13768 18880,13670
P18: 4.3 ]}.3 `~.3 Connector.18 H.3 INSERT.3 LSHIFT.3 M.3 PGDN.3 VOL-.3 | length 23943.3
  Top Layer w10: `~.3 8390,14843.08 8315,14768.08 8315,14589 8435,14469 8435,14048.08 8410,14023.08 8410,13882 8517,13775 8517,13558 8855,13220 LSHIFT.3 ; 4.3 11431,15275 11584,15122 11584,14916 11640,14860 11775,14860 11788,14873 11788,15124 12083,15419 12083,15560 12150,15627 12150,15772 12095,15827 12095,16040 12120,16065 12160,16065 12320,15905 12320,15170 Connector.18 12360,15070 12360,14862.23 12458.5,14763.73 12458.5,14686.27 12420,14647.77 v1(12420,14380) ; v1(13460,14340) 13460,14321.92 13340,14201.92 13340,14148.08 13378.08,14110 13396.78,14110 13455,14051.78 H.3 13455,13490 13585,13360 13840,13360 13865,13385 14442,13385 14555,13272 14555,13045 M.3 ; v1(17488,13490) 17704,13706 17704,14464 ]}.3 18116,14876 18116,15996 VOL-.3
  Bottom Layer w10: `~.3 8508,15157 11066,15157 11184,15275 4.3 ; v1(12420,14380) 12516.5,14283.5 13403.5,14283.5 v1(13460,14340) ; M.3 14950,13390 15145,13390 15175,13360 15621,13360 15646,13385 15840,13385 15880,13345 16440,13345 16585,13490 v1(17488,13490) ; ]}.3 17765,14590 18320,15145 18499,15145 18648,15294 18933,15294 19022,15205 19760,15205 INSERT.3 19882,15327 21343,15327 21370,15300 21370,14906 21325,14861 PGDN.3
P19: 1.3 3.3 Connector.19 ENTER.3 G.3 LALT.3 PGUP.3 X.3 | length 18892.1
  Top Layer w10: LALT.3 10360,12550 X.3 10830,13340 10845,13355 10845,13731 10771,13805 10771,14758.23 10827,14814.23 10827,15088 3.3 ; Connector.19 12398.2,15038.2 12398.2,14852.32 12479,14771.51 12479,14669 12470,14660 12470,14192 12700,13962 G.3 ; v1(18340,15051) 18301,15012 18301,14127 18420,14008 ENTER.3
  Bottom Layer w10: 1.3 9218,15197 10562,15197 3.3 ; X.3 11308,13498 12428,13498 G.3 12843,13627 17485,13627 17699,13841 18349,13841 ENTER.3 ; v1(18340,15051) 21101,15051 PGUP.3
P20: "'\".3" .>.3 Connector.20 F9.3 F10.3 F12.3 RALT.3 U.3 | length 12351
  Top Layer w10: U.3 14114,14619 14114,14975 v1(13991,15098) 13991,15797 v1(14264,16070) ; .>.3 16075,12609 15985,12519 RALT.3 16025,12230 16965,12230 17200,12465 17200,13775 17325,13900 17325,15275 17363,15313 17363,15568 17405,15610 17405,15900 17390,15915 F12.3
  Bottom Layer w10: Connector.20 12530,15165 12540,15175 13914,15175 v1(13991,15098) ; v1(14264,16070) 15095,16070 F9.3 15184,16069 15841,16069 F10.3 15996.76,15913.24 17283.24,15913.24 F12.3
P21: 6.3 8.3 Connector.21 ESC.3 F2.3 F3.3 LCTRL.3 SPACE.3 Z.3 | length 16291.5
  Top Layer w10: F2.3 10041,15869 10041,14783.23 10016,14758.23 10016,13607 10090,13533 10090,13313 10075,13298 Z.3 ; v1@12585,15381 v1(12590,15376) 12630,15336 12630,15230 12600,15200 Connector.21 ; 6.3 12885,15133 13204,14814 13204,14307 13267,14244 13267,14069.23 13211,14013.23 13211,12568 13170,12527 SPACE.3
  Bottom Layer w10: ESC.3 8452,16087 9823,16087 F2.3 9935,16065 10595,16065 F3.3 10693,16073 11880,16073 11920,16033 11920,15692 12095,15517 12095,15459 12173,15381 v1@12585,15381 ; LCTRL.3 8485,12520 8370,12635 8370,12759 8611,13000 8611,13277.9 8698,13364.9 8698,13440 8750,13492 8826,13492 9240,13078 10017,13078 Z.3 ; v1(12590,15376) 12784,15376 6.3 12950,15340 14325,15340 8.3
P22: \.0 CAPS.0 Connector.22 END.0 LALT.0 RALT.0 | length 17992.7
  Top Layer w10: CAPS.0 9282,13513 9282,12640 9327,12595 9453,12595 9528,12670 LALT.0 ; v1(12487,12852) 12487,13250 12799,13562 12799,14000 12780.5,14018.5 12709.5,14018.5 12583.08,14144.92 12583.08,14204.08 12670,14291 Connector.22 ; v1(18625,13050) 18625,14342 18650,14367 \.0
  Bottom Layer w10: LALT.0 12305,12670 v1(12487,12852) 12487,12744 14528,12744 14602,12670 RALT.0 16715,12670 16781,12604 17198,12604 17341,12747 18130.47,12747 18433.47,13050 v1(18625,13050) ; \.0 18714,14989 20461,14989 END.0
P23: 0.0 Connector.23 LCTRL.0 RCTRL.0 VOL+.0 VOL-.0 | length 18596.7
  Top Layer w10: Connector.23 12740,15253.44 12906.56,15420 13111,15420 13121,15430 ; v1(13121,15745) 13121,15430 ; v1(13276,12946) 13276,13719 13418.5,13861.5 13418.5,14041.29 13320,14139.79 13320,14560 13261,14619 13261,14850 13275,14864 13275,15021 13121,15175 13121,15430 ; 0.0 16036,15871 17029,15871 17374,16216 17374,16357 17437,16420 VOL-.0 ; RCTRL.0 18834,12764 18834,14933 18741,15026 18741,15986 18840,16085 VOL+.0
  Bottom Layer w10: LCTRL.0 8435,12688 9204,12688 9451,12935 9662,12935 9665,12938 12274,12938 12292,12956 13266,12956 v1(13276,12946) ; v1(13121,15745) 13147,15771 15744,15771 0.0 ; VOL-.0 VOL+.0
P24: 2.0 Connector.24 LWIN.0 RWIN.0 | length 13559.7
  Top Layer w10: LWIN.0 9306,12734 9306,14520 9454,14668 9454,14833 9395,14892 9395,15630 9440,15675 2.0 ; Connector.24 12810,14091 13090,13811 13090,13360 13025,13295 v1(13025,12915)
  Bottom Layer w10: LWIN.0 9600,12900 13010,12900 v1(13025,12915) 13040,12900 16645,12900 RWIN.0
pads on no net: 0. 1. 2. 3. 4. 5. 6. 7. 8. 9. "'\"." +=. ,<. -. .>. /?. ;. [{. \. ]}. `~. A. B. BS. C. C.3 CAPS. D. DELETE. DOWN. E. END. ENTER. ESC. F1. F2. F3. F4. F5. F6. F7. F8. F9. F10. F11. F12. F. G. H. HOME. I. INSERT. J. K. L. LALT. LCTRL. LEFT. LSHIFT. LWIN. M. MENU. N. O. P. PAUSE. PGDN. PGUP. PS. Q. R. RALT. RCTRL. RIGHT. RSHIFT. RWIN. S. SCLK. SPACE. T. TAB. U. UP. V. VOL+. VOL-. W. X. Y. Z.

## Silkscreen, mask and mechanical layers (free items; w line width, h text height)
Mechanical 2:
  drawing of 1736 lines, arcs and shapes, not listed